# Altium PCB Button3x4S-3_Pcb.PcbDoc
Units mil, origin at the board's own origin, x right, y up, seen from the top; angles counter-clockwise.
Board outline 400 x 500 mil, 2 copper layers (Top Layer, Bottom Layer); 16 components, 5 nets, 28 pads, 4 vias.
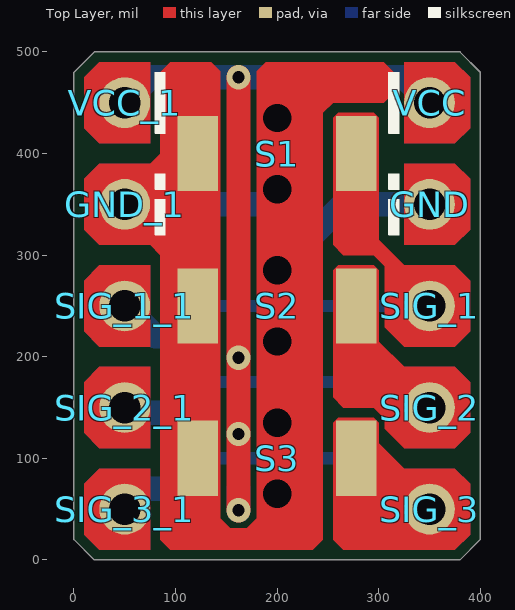
[diagram p0: Top Layer view]
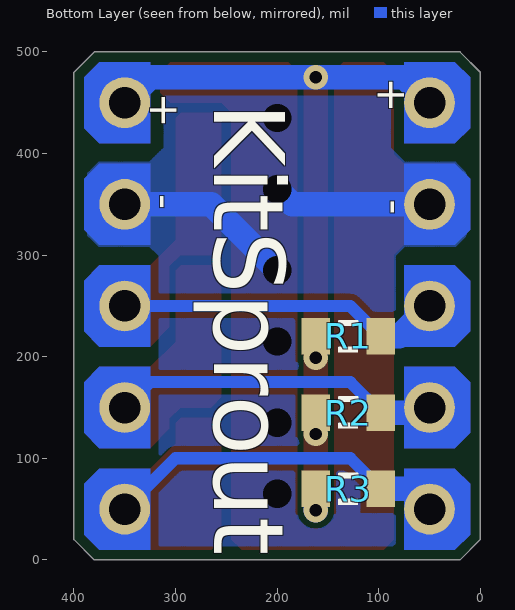
[diagram p1: Bottom Layer view, seen from below]
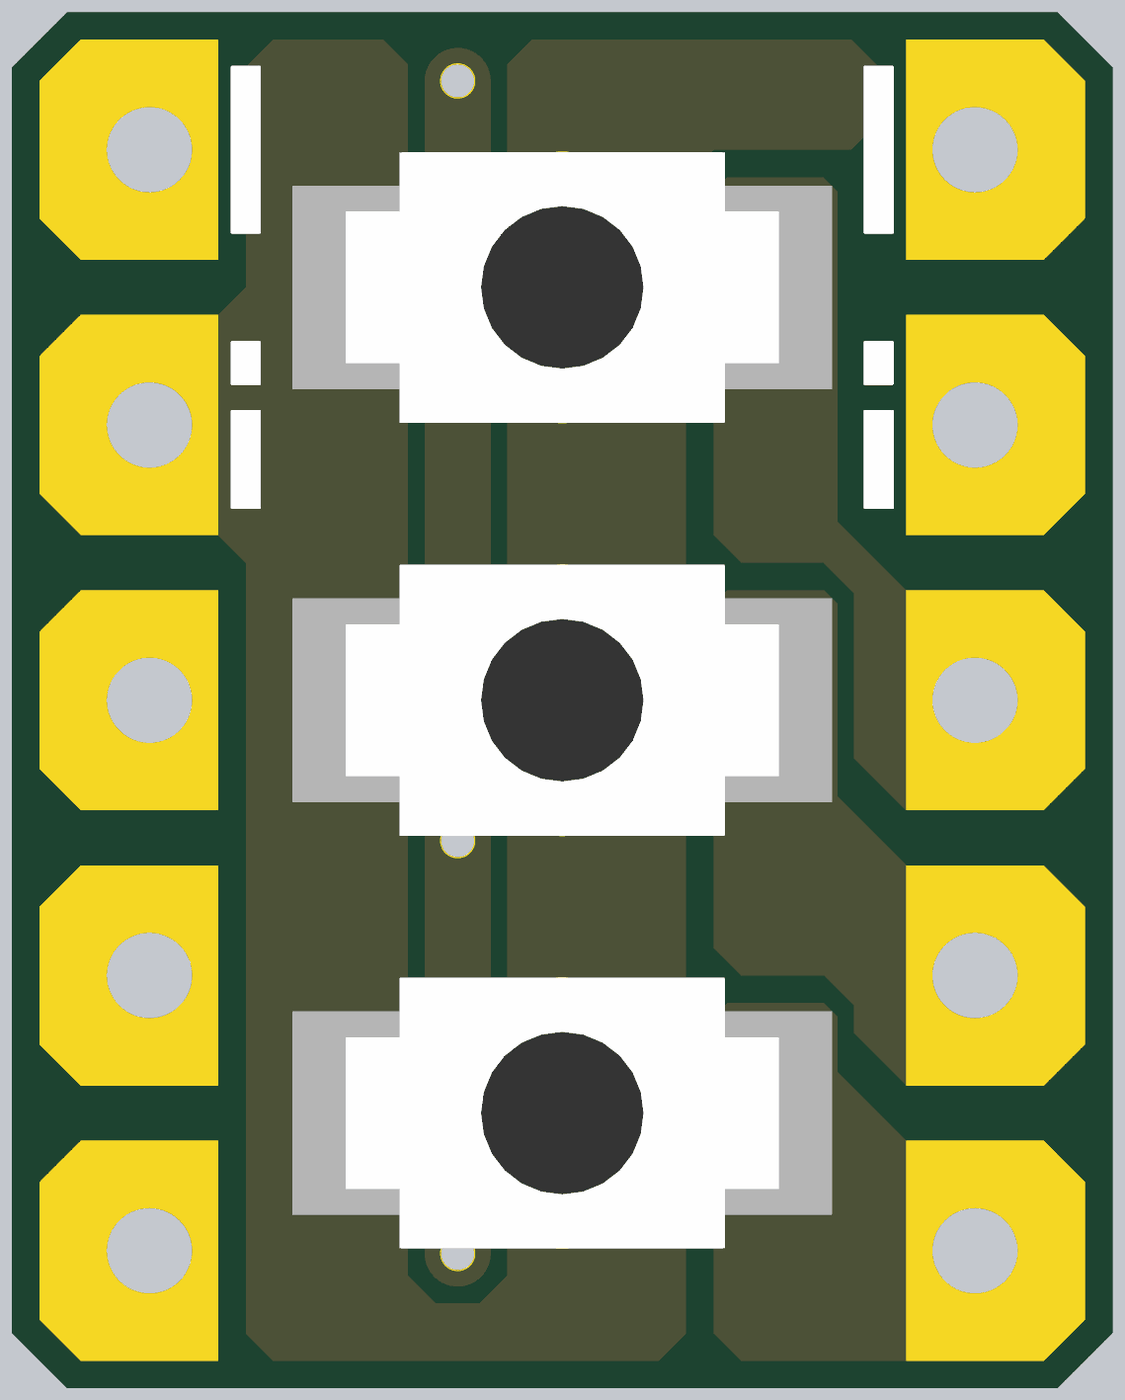
[diagram p2: 3D render of the assembled board from above, using the file's embedded part models]
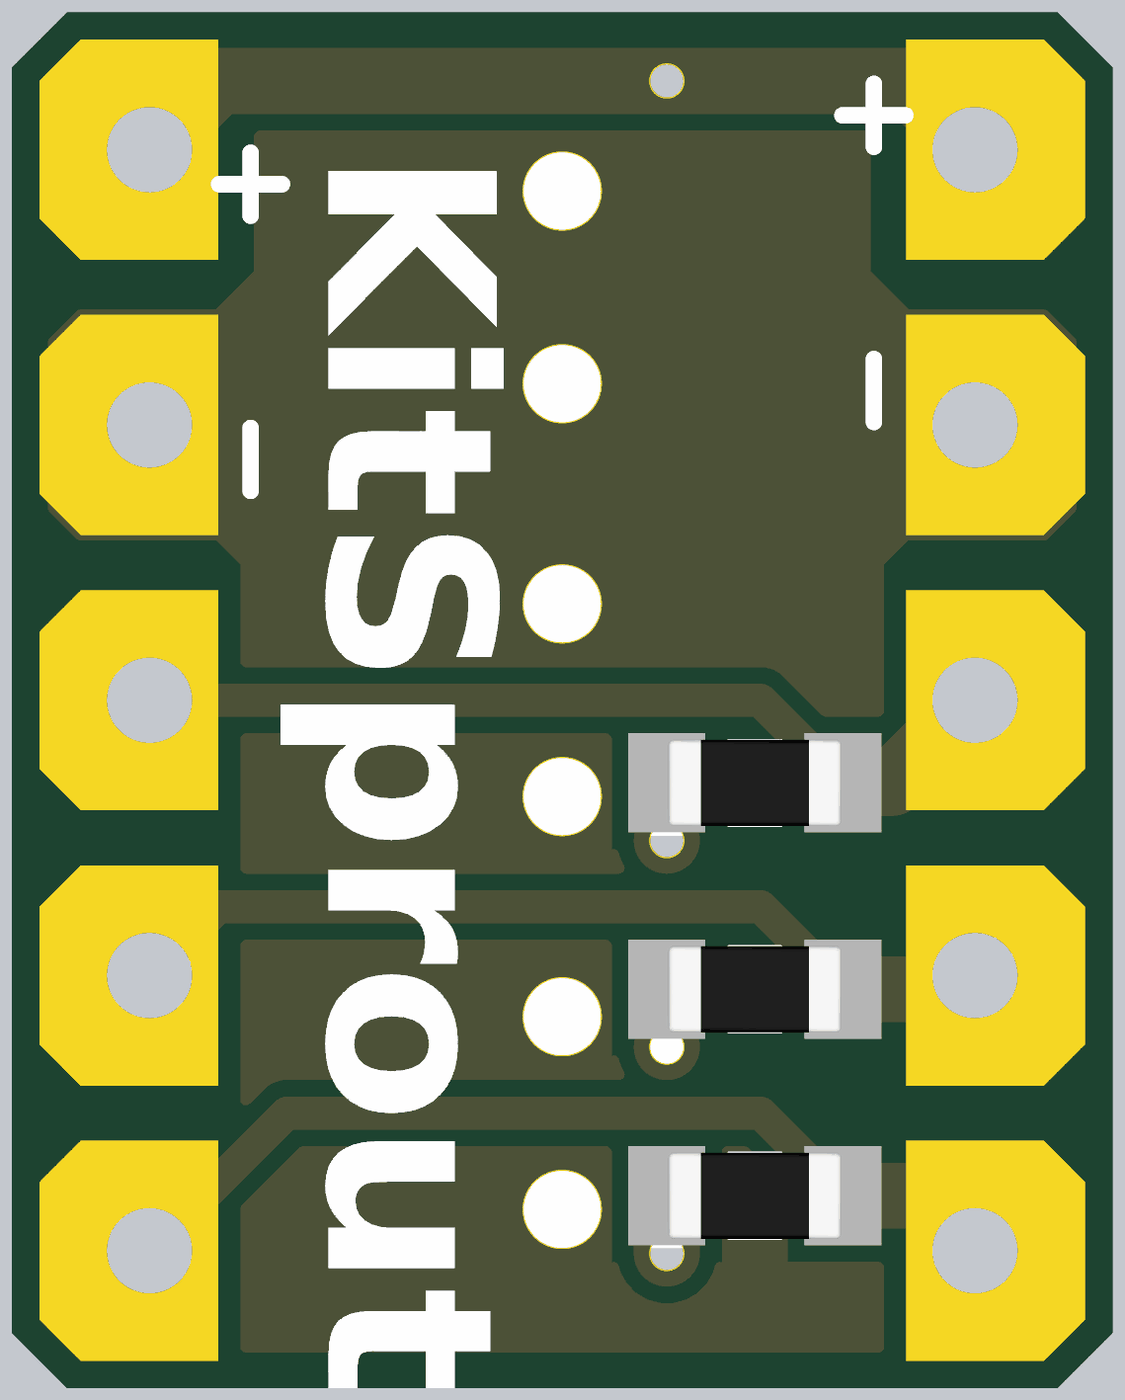
[diagram p3: 3D render of the assembled board from below, using the file's embedded part models]

## Layer stack, top to bottom
Top Solder: solder mask 0.4, Solder Resist, Dk 3.5
Top Layer: signal copper 1.4
Dielectric1: dielectric 12.6, FR-4, Dk 4.8
Bottom Layer: signal copper 1.4
Bottom Solder: solder mask 0.4, Solder Resist, Dk 3.5

## Board outline
0,20 20,0 380,0 400,20 400,480 380,500 20,500 0,480

## Design rules (kind name [scope] priority, off if disabled: settings)
Clearance ClearancePolygon [InPolygon] p1: gap=6
Clearance [All] p2: gap=6
ComponentClearance [All] p1: gap=0 collisioncheckmode=3 verticalgap=0 showdistances=FALSE
Height [All] p1: minheight=0 maxheight=5000 prefheight=500
HoleToHoleClearance [All] p1: gap=6 allowstackedmicrovias=TRUE
MinimumSolderMaskSliver [All] p1: minsoldermaskwidth=6
PlaneConnect [All] p1: planeconnectstyle=Direct reliefexpansion=20 reliefentries=4 reliefconductorwidth=20 reliefairgap=10
PolygonConnect [All] p1: connectstyle=Direct reliefconductorwidth=20 reliefentries=4 polygonreliefangle="90 Angle" airgapwidth=10
RoutingVias [All] p1: holewidth=12 width=20 viastyle="Through Hole" minholewidth=12 minwidth=20 maxholewidth=100 maxwidth=200
SilkToSilkClearance [All] p1: silktosilkclearance=0
SilkToSolderMaskClearance SilkscreenOverComponentPads [IsPad] p1: minsilkscreentomaskgap=1 clearancetoexposedcopper=TRUE
SolderMaskExpansion [All] p1: expansion=0
Width [All] p1: maxlimit=30 minlimit=6 preferedwidth=10
22 further rules are at their usual default settings.

## Classes and differential pairs
component class Button3x4S-3_Sch: GND R1 R2 R3 S1 S2 S3 SIG_1 SIG_2 SIG_3 VCC

## Components (designator, comment, footprint, x,y, rotation, side; value= is the part's Value field where it differs from the comment)
GND "HDR-PAD_2.54" HDR-PAD_2.54 350,350 r0 top
GND_1 "HDR-PAD_2.54" HDR-PAD_2.54 50,350 r0 top (schematic designator GND)
R1 "Res_0603" RES_0603 130,220 r0 bottom
R2 "Res_0603" RES_0603 130,145 r0 bottom
R3 "Res_0603" RES_0603 130,70 r0 bottom
S1 "ButtonTACT_3x4x2_180" ButtonTACT_3x4x2_180H 200,400 r0 top locked
S2 "ButtonTACT_3x4x2_180" ButtonTACT_3x4x2_180H 200,250 r0 top locked
S3 "ButtonTACT_3x4x2_180" ButtonTACT_3x4x2_180H 200,100 r0 top locked
SIG_1 "HDR-PAD_2.54" HDR-PAD_2.54 350,250 r90 top
SIG_1_1 "HDR-PAD_2.54" HDR-PAD_2.54 50,250 r90 top (schematic designator SIG_1)
SIG_2 "HDR-PAD_2.54" HDR-PAD_2.54 350,150 r90 top
SIG_2_1 "HDR-PAD_2.54" HDR-PAD_2.54 50,150 r90 top (schematic designator SIG_2)
SIG_3 "HDR-PAD_2.54" HDR-PAD_2.54 350,50 r90 top
SIG_3_1 "HDR-PAD_2.54" HDR-PAD_2.54 50,50 r90 top (schematic designator SIG_3)
VCC "HDR-PAD_2.54" HDR-PAD_2.54 350,450 r0 top
VCC_1 "HDR-PAD_2.54" HDR-PAD_2.54 50,450 r0 top (schematic designator VCC)

## Footprints (in the part's own frame and the unit in brackets; to place one, negate y for a bottom-side part, rotate by r counter-clockwise, add the part's x,y. Pads: shape width x height; smd on the part's side, far side on the other; paste and mask are expansions set on the pad)
ButtonTACT_3x4x2_180H [mil]
  round 0 hole 28: 0(0,-35) 0(0,35)
  rect 40x74 smd: 1(-78,0) 2(78,0)
  body extent -79,-49 79,49, height 63
HDR-PAD_2.54 [mil]
  round 50 hole 31: 1(0,0)
RES_0603 [mil]
  rect 28x36 smd: 1(-32,0) 2(32,0)
  silkscreen extent -10,-16 10,16, body extent -31,-16 32,16, height 20

## Part data
GND GND_1 SIG_1 SIG_1_1 SIG_2 SIG_2_1 SIG_3 SIG_3_1 VCC VCC_1: "Header"
R1 R2 R3: "Resistor"
S1 S2 S3: "Button"

## Via types
v1: diameter 24, hole 12, Top Layer to Bottom Layer, 4 vias

## Nets (pads, with @x,y where several pads share a name; then routed paths per layer and width w, separated by ;. In a path a pad name is that pad's centre, name@x,y a point inside that pad or via, vN(x,y) a via of type N, cw(c..) or ccw(c..) an arc to the next point about the centre after c; other vN are vias at no path point)
GND: GND.1 GND_1.1 S1.0 S1.1 S2.0 S2.1 S3.0 S3.1 | length 703.1
  Top Layer w24: 200,65 200,135 200,215 200,285 200,365 200,435
  Bottom Layer w24: GND_1.1 185,350 200,365 ; 200,285 265,350 GND.1
SIG_1: R1.1 S1.2 SIG_1.1 SIG_1_1.1 | length 324.9
  Bottom Layer w12: R1.1 128,250 SIG_1.1
  Bottom Layer w24: SIG_1_1.1 80,220 R1.1
SIG_2: R2.1 S2.2 SIG_2.1 SIG_2_1.1 | length 324.9
  Bottom Layer w12: R2.1 128,175 325,175 SIG_2.1
  Bottom Layer w24: SIG_2_1.1 55,145 R2.1
SIG_3: R3.1 S3.2 SIG_3.1 SIG_3_1.1 | length 341.4
  Bottom Layer w12: R3.1 128,100 300,100 SIG_3.1
  Bottom Layer w24: SIG_3_1.1 70,70 R3.1
VCC: R1.2 R2.2 R3.2 VCC.1 VCC_1.1 | length 767.7
  Top Layer w24: v1(162,49) v1(162,124) v1(162,199) v1(162,475)
  Bottom Layer w24: VCC_1.1 75,475 325,475 VCC.1 ; v1(162,49) R3.2

## Polygon pours and split planes (outlines as drawn)
GND on Bottom Layer "Mechanical 1-No Net" (hatched 90Degree grid 2 track 4, remove dead copper, pour order 3): 25,485 15,475 15,455 15,25 25,15 65,15 375,15 385,25 385,45 385,475 375,485

## Other copper
Top Layer:
  region net GND: 10,375 25,390 75,390 85,400 85,480 95,490 135,490 144,481 144,41 154,31 170,31 180,41 180,481 189,490 305,490 315,480 315,460 305,450 255,450 245,440 245,20 235,10 95,10 85,20 85,300 75,310 25,310 10,325
  region net SIG_1: 300,435 295,440 260,440 255,435 255,310 265,300 295,300 306,289 306,229 325,210 375,210 390,225 390,275 375,290 325,290 300,315
  region net SIG_2: 300,285 295,290 260,290 255,285 255,160 265,150 295,150 306,139 306,129 325,110 375,110 390,125 390,175 375,190 325,190 300,215
  region net SIG_3: 300,135 295,140 260,140 255,135 255,20 265,10 375,10 390,25 390,75 375,90 325,90 300,115
Bottom Layer:
  pour cut-out: 390,25 375,10 315,10 315,300 325,310 375,310 390,325
  pour cut-out: 310,490 375,490 390,475 390,375 375.07,390 325,390 310,405
  pour cut-out: 25,490 90,490 90,405 75,390 25,390 10,375 10,475
  pour cut-out: 85,10 25,10 10,25 10,325 24.93,310 75,310 85,300
Multi-Layer:
  region net SIG_1: 325,210 375,210 390,225 390,275 375,290 325,290
  region net GND: 325,310 375,310 390,325 390,375 375,390 325,390
  region net VCC: 325,410 375,410 390,425 390,475 375,490 325,490
  region net SIG_2: 325,110 375,110 390,125 390,175 375,190 325,190
  region net SIG_3: 325,10 375,10 390,25 390,75 375,90 325,90
  region net SIG_1: 75,290 25,290 10,275 10,225 25,210 75,210
  region net VCC: 75,490 25,490 10,475 10,425 25,410 75,410
  region net GND: 75,390 25,390 10,375 10,325 25,310 75,310
  region net SIG_2: 75,190 25,190 10,175 10,125 25,110 75,110
  region net SIG_3: 75,90 25,90 10,75 10,25 25,10 75,10

## Silkscreen, mask and mechanical layers (free items; w line width, h text height)
Top Overlay:
  region: 310,380 320,380 320,365 310,365
  region: 310,355 320,355 320,320 310,320
  region: 320,420 310,420 310,480 320,480
  region: 80,380 90,380 90,365 80,365
  region: 80,355 90,355 90,320 80,320
  region: 80,480 90,480 90,420 80,420
  lines w1: 80,320 90,320 90,355 80,355 80,320 ; 80,365 80,380 90,380 90,365 80,365 ; 80,420 80,480 90,480 90,420 80,420 ; 310,320 320,320 320,355 310,355 310,320 ; 310,365 310,380 320,380 320,365 310,365 ; 310,420 310,480 320,480 320,420 310,420
Bottom Overlay:
  text "+" at 325,460 h30 r90
  text "KitSprout" at 285,450 h120 r90
  text "+" at 75,440 h30 r270
  text "-" at 325,360 h30 r90
  text "-" at 75,340 h30 r270
Top Solder:
  region: 325,210 375,210 390,225 390,275 375,290 325,290
  region: 325,310 375,310 390,325 390,375 375,390 325,390
  region: 325,410 375,410 390,425 390,475 375,490 325,490
  region: 325,110 375,110 390,125 390,175 375,190 325,190
  region: 325,10 375,10 390,25 390,75 375,90 325,90
  region: 75,290 25,290 10,275 10,225 25,210 75,210
  region: 75,490 25,490 10,475 10,425 25,410 75,410
  region: 75,390 25,390 10,375 10,325 25,310 75,310
  region: 75,190 25,190 10,175 10,125 25,110 75,110
  region: 75,90 25,90 10,75 10,25 25,10 75,10
Bottom Solder:
  region: 325,210 375,210 390,225 390,275 375,290 325,290
  region: 325,310 375,310 390,325 390,375 375,390 325,390
  region: 325,410 375,410 390,425 390,475 375,490 325,490
  region: 325,110 375,110 390,125 390,175 375,190 325,190
  region: 325,10 375,10 390,25 390,75 375,90 325,90
  region: 75,290 25,290 10,275 10,225 25,210 75,210
  region: 75,490 25,490 10,475 10,425 25,410 75,410
  region: 75,390 25,390 10,375 10,325 25,310 75,310
  region: 75,190 25,190 10,175 10,125 25,110 75,110
  region: 75,90 25,90 10,75 10,25 25,10 75,10
Mechanical 1:
  the board outline again, w2

## Dimensions
0,480 to 400,480 on Mechanical 13
380,500 to 380,0 on Mechanical 13